# EAGLE board 00A-93-A1-01 (EAGLE 6.3)
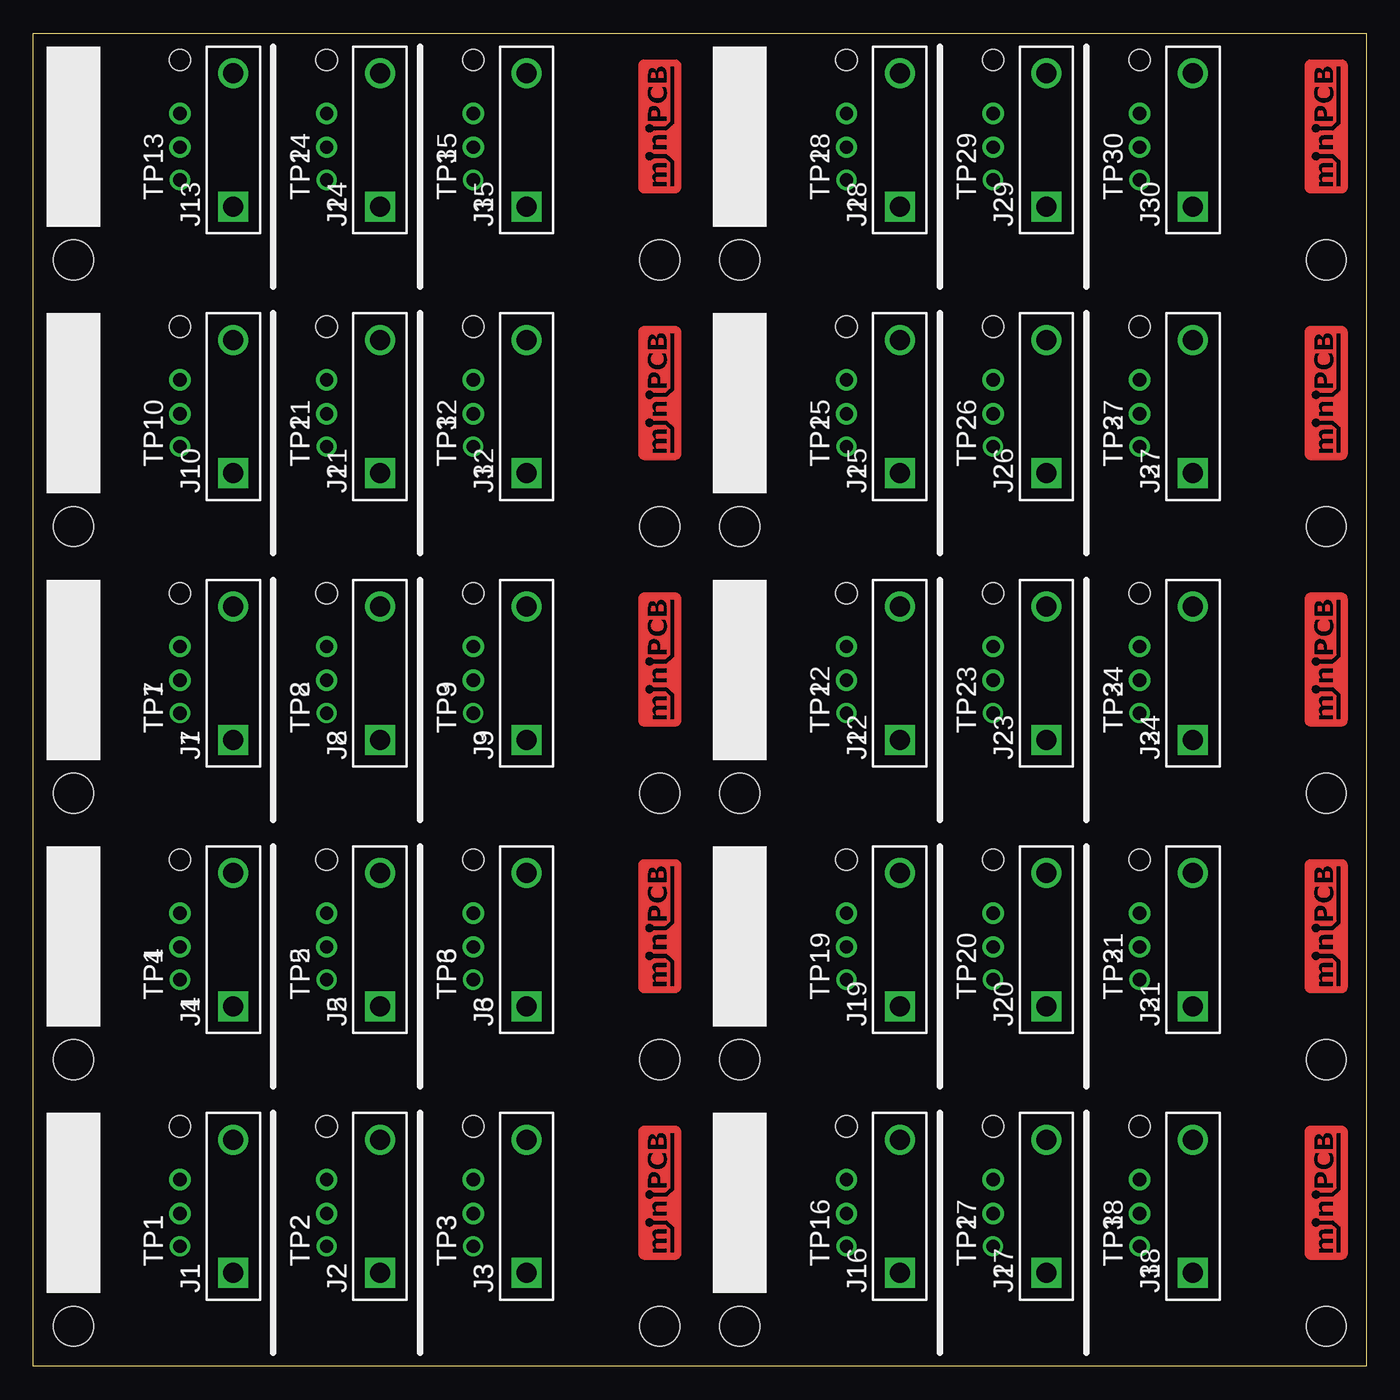
[diagram p0: board, top side]
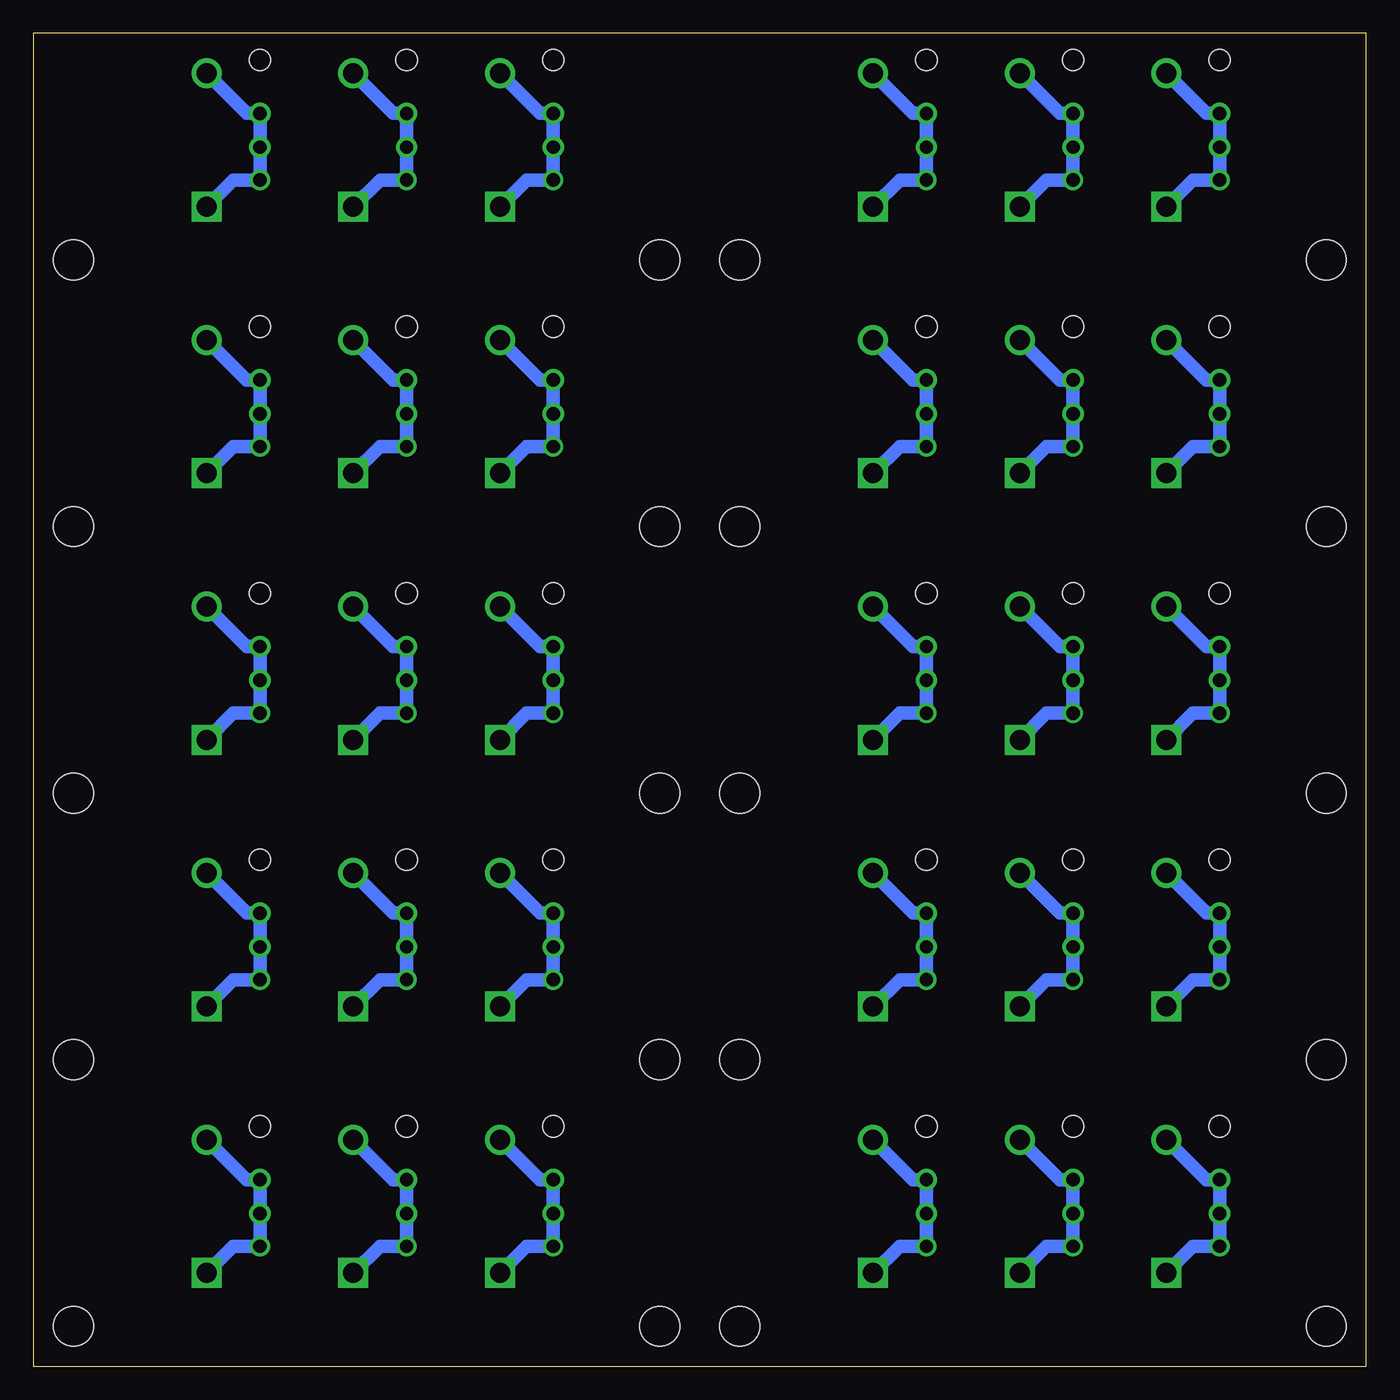
[diagram p1: board, bottom side, seen from below]

Size 100 x 100 mm. Coordinates in mm from the lower left corner, seen from the top.
Outline: 0,0 0,100 100,100 100,0 0,0
Copper layers (1*16): Top 0.035mm / dielectric 1.5mm / Bottom 0.035mm
Design rules "default": minimum track width 10mil, minimum drill 0.6mm, track to track 8mil, track to pad 8mil, pad to pad 8mil, via to via 8mil, smd to smd 8mil, copper to edge 40mil, drill to drill 8mil, minimum pad ring 10mil, minimum via ring 8mil, stop-mask expansion 4mil, vias tented up to drill 0mil, thermal gap 10mil

## Footprints (pad centres in the part's own frame; a part is rotated, then mirrored left to right if it is on the bottom)
PINS_1_KE6060 = drill 1.5 square: 1 -5,0 | drill 1.5: 2 5,0
PINS_1_1MM-NOTEXT = drill 1 pad 1.6: 1 4,0; 2 6.54,0 | hole 1.6: 0,0
MINIPCB_00A_20X50 = hole 3: 47,3; 3,3
PINS_1_TESTPOINT_KE5000_NOTEXT = drill 1: 1 0,0

## Placement (x,y rotation side)
E$1  [MINIPCB_PANEL_IMAGEFRAME]  -25,-35 0 top  (outside the outline)
J1  [PINS_1_KE6060]  15,12 90 top
J2  [PINS_1_KE6060]  26,12 90 top
J3  [PINS_1_KE6060]  37,12 90 top
J4  [PINS_1_KE6060]  15,32 90 top
J5  [PINS_1_KE6060]  26,32 90 top
J6  [PINS_1_KE6060]  37,32 90 top
J7  [PINS_1_KE6060]  15,52 90 top
J8  [PINS_1_KE6060]  26,52 90 top
J9  [PINS_1_KE6060]  37,52 90 top
J10  [PINS_1_KE6060]  15,72 90 top
J11  [PINS_1_KE6060]  26,72 90 top
J12  [PINS_1_KE6060]  37,72 90 top
J13  [PINS_1_KE6060]  15,92 90 top
J14  [PINS_1_KE6060]  26,92 90 top
J15  [PINS_1_KE6060]  37,92 90 top
J16  [PINS_1_KE6060]  65,12 90 top
J17  [PINS_1_KE6060]  76,12 90 top
J18  [PINS_1_KE6060]  87,12 90 top
J19  [PINS_1_KE6060]  65,32 90 top
J20  [PINS_1_KE6060]  76,32 90 top
J21  [PINS_1_KE6060]  87,32 90 top
J22  [PINS_1_KE6060]  65,52 90 top
J23  [PINS_1_KE6060]  76,52 90 top
J24  [PINS_1_KE6060]  87,52 90 top
J25  [PINS_1_KE6060]  65,72 90 top
J26  [PINS_1_KE6060]  76,72 90 top
J27  [PINS_1_KE6060]  87,72 90 top
J28  [PINS_1_KE6060]  65,92 90 top
J29  [PINS_1_KE6060]  76,92 90 top
J30  [PINS_1_KE6060]  87,92 90 top
P1  [PINS_1_1MM-NOTEXT]  11,18 270 top
P2  [PINS_1_1MM-NOTEXT]  22,18 270 top
P3  [PINS_1_1MM-NOTEXT]  33,18 270 top
P4  [PINS_1_1MM-NOTEXT]  11,38 270 top
P5  [PINS_1_1MM-NOTEXT]  22,38 270 top
P6  [PINS_1_1MM-NOTEXT]  33,38 270 top
P7  [PINS_1_1MM-NOTEXT]  11,58 270 top
P8  [PINS_1_1MM-NOTEXT]  22,58 270 top
P9  [PINS_1_1MM-NOTEXT]  33,58 270 top
P10  [PINS_1_1MM-NOTEXT]  11,78 270 top
P11  [PINS_1_1MM-NOTEXT]  22,78 270 top
P12  [PINS_1_1MM-NOTEXT]  33,78 270 top
P13  [PINS_1_1MM-NOTEXT]  11,98 270 top
P14  [PINS_1_1MM-NOTEXT]  22,98 270 top
P15  [PINS_1_1MM-NOTEXT]  33,98 270 top
P16  [PINS_1_1MM-NOTEXT]  61,18 270 top
P17  [PINS_1_1MM-NOTEXT]  72,18 270 top
P18  [PINS_1_1MM-NOTEXT]  83,18 270 top
P19  [PINS_1_1MM-NOTEXT]  61,38 270 top
P20  [PINS_1_1MM-NOTEXT]  72,38 270 top
P21  [PINS_1_1MM-NOTEXT]  83,38 270 top
P22  [PINS_1_1MM-NOTEXT]  61,58 270 top
P23  [PINS_1_1MM-NOTEXT]  72,58 270 top
P24  [PINS_1_1MM-NOTEXT]  83,58 270 top
P25  [PINS_1_1MM-NOTEXT]  61,78 270 top
P26  [PINS_1_1MM-NOTEXT]  72,78 270 top
P27  [PINS_1_1MM-NOTEXT]  83,78 270 top
P28  [PINS_1_1MM-NOTEXT]  61,98 270 top
P29  [PINS_1_1MM-NOTEXT]  72,98 270 top
P30  [PINS_1_1MM-NOTEXT]  83,98 270 top
PCB1  [MINIPCB_00A_20X50]  0,0 0 top
PCB2  [MINIPCB_00A_20X50]  0,20 0 top
PCB3  [MINIPCB_00A_20X50]  0,40 0 top
PCB4  [MINIPCB_00A_20X50]  0,60 0 top
PCB5  [MINIPCB_00A_20X50]  0,80 0 top
PCB6  [MINIPCB_00A_20X50]  50,0 0 top
PCB7  [MINIPCB_00A_20X50]  50,20 0 top
PCB8  [MINIPCB_00A_20X50]  50,40 0 top
PCB9  [MINIPCB_00A_20X50]  50,60 0 top
PCB10  [MINIPCB_00A_20X50]  50,80 0 top
TP1  [PINS_1_TESTPOINT_KE5000_NOTEXT]  11,9 90 top
TP2  [PINS_1_TESTPOINT_KE5000_NOTEXT]  22,9 90 top
TP3  [PINS_1_TESTPOINT_KE5000_NOTEXT]  33,9 90 top
TP4  [PINS_1_TESTPOINT_KE5000_NOTEXT]  11,29 90 top
TP5  [PINS_1_TESTPOINT_KE5000_NOTEXT]  22,29 90 top
TP6  [PINS_1_TESTPOINT_KE5000_NOTEXT]  33,29 90 top
TP7  [PINS_1_TESTPOINT_KE5000_NOTEXT]  11,49 90 top
TP8  [PINS_1_TESTPOINT_KE5000_NOTEXT]  22,49 90 top
TP9  [PINS_1_TESTPOINT_KE5000_NOTEXT]  33,49 90 top
TP10  [PINS_1_TESTPOINT_KE5000_NOTEXT]  11,69 90 top
TP11  [PINS_1_TESTPOINT_KE5000_NOTEXT]  22,69 90 top
TP12  [PINS_1_TESTPOINT_KE5000_NOTEXT]  33,69 90 top
TP13  [PINS_1_TESTPOINT_KE5000_NOTEXT]  11,89 90 top
TP14  [PINS_1_TESTPOINT_KE5000_NOTEXT]  22,89 90 top
TP15  [PINS_1_TESTPOINT_KE5000_NOTEXT]  33,89 90 top
TP16  [PINS_1_TESTPOINT_KE5000_NOTEXT]  61,9 90 top
TP17  [PINS_1_TESTPOINT_KE5000_NOTEXT]  72,9 90 top
TP18  [PINS_1_TESTPOINT_KE5000_NOTEXT]  83,9 90 top
TP19  [PINS_1_TESTPOINT_KE5000_NOTEXT]  61,29 90 top
TP20  [PINS_1_TESTPOINT_KE5000_NOTEXT]  72,29 90 top
TP21  [PINS_1_TESTPOINT_KE5000_NOTEXT]  83,29 90 top
TP22  [PINS_1_TESTPOINT_KE5000_NOTEXT]  61,49 90 top
TP23  [PINS_1_TESTPOINT_KE5000_NOTEXT]  72,49 90 top
TP24  [PINS_1_TESTPOINT_KE5000_NOTEXT]  83,49 90 top
TP25  [PINS_1_TESTPOINT_KE5000_NOTEXT]  61,69 90 top
TP26  [PINS_1_TESTPOINT_KE5000_NOTEXT]  72,69 90 top
TP27  [PINS_1_TESTPOINT_KE5000_NOTEXT]  83,69 90 top
TP28  [PINS_1_TESTPOINT_KE5000_NOTEXT]  61,89 90 top
TP29  [PINS_1_TESTPOINT_KE5000_NOTEXT]  72,89 90 top
TP30  [PINS_1_TESTPOINT_KE5000_NOTEXT]  83,89 90 top

## Library data of the parts
E$1 J1-J30 P1-P30 TP1-TP30 = minipcb
PCB1-PCB10 = minipcb; PART_NUMBER: 00A-93-A1-01

## Nets
N$1: J1.1 J1.2 P1.1 P1.2 TP1.1
N$2: J4.1 J4.2 P4.1 P4.2 TP4.1
N$3: J2.1 J2.2 P2.1 P2.2 TP2.1
N$4: J5.1 J5.2 P5.1 P5.2 TP5.1
N$5: J3.1 J3.2 P3.1 P3.2 TP3.1
N$6: J6.1 J6.2 P6.1 P6.2 TP6.1
N$7: J7.1 J7.2 P7.1 P7.2 TP7.1
N$8: J8.1 J8.2 P8.1 P8.2 TP8.1
N$9: J9.1 J9.2 P9.1 P9.2 TP9.1
N$10: J10.1 J10.2 P10.1 P10.2 TP10.1
N$11: J11.1 J11.2 P11.1 P11.2 TP11.1
N$12: J12.1 J12.2 P12.1 P12.2 TP12.1
N$13: J13.1 J13.2 P13.1 P13.2 TP13.1
N$14: J14.1 J14.2 P14.1 P14.2 TP14.1
N$15: J15.1 J15.2 P15.1 P15.2 TP15.1
N$16: J16.1 J16.2 P16.1 P16.2 TP16.1
N$17: J17.1 J17.2 P17.1 P17.2 TP17.1
N$18: J18.1 J18.2 P18.1 P18.2 TP18.1
N$19: J19.1 J19.2 P19.1 P19.2 TP19.1
N$20: J20.1 J20.2 P20.1 P20.2 TP20.1
N$21: J21.1 J21.2 P21.1 P21.2 TP21.1
N$22: J22.1 J22.2 P22.1 P22.2 TP22.1
N$23: J23.1 J23.2 P23.1 P23.2 TP23.1
N$24: J24.1 J24.2 P24.1 P24.2 TP24.1
N$25: J25.1 J25.2 P25.1 P25.2 TP25.1
N$26: J26.1 J26.2 P26.1 P26.2 TP26.1
N$27: J27.1 J27.2 P27.1 P27.2 TP27.1
N$28: J28.1 J28.2 P28.1 P28.2 TP28.1
N$29: J29.1 J29.2 P29.1 P29.2 TP29.1
N$30: J30.1 J30.2 P30.1 P30.2 TP30.1

## Tracks (layer width: path | path; a pad name or v marks a point on that pad's centre or on a via)
N$1
  Bottom 1: J1.2 12,14 P1.1 P1.2 TP1.1 13,9 J1.1
N$2
  Bottom 1: J4.2 12,34 P4.1 P4.2 TP4.1 13,29 J4.1
N$3
  Bottom 1: J2.2 23,14 P2.1 P2.2 TP2.1 24,9 J2.1
N$4
  Bottom 1: J5.2 23,34 P5.1 P5.2 TP5.1 24,29 J5.1
N$5
  Bottom 1: J3.2 34,14 P3.1 P3.2 TP3.1 35,9 J3.1
N$6
  Bottom 1: J6.2 34,34 P6.1 P6.2 TP6.1 35,29 J6.1
N$7
  Bottom 1: J7.2 12,54 P7.1 P7.2 TP7.1 13,49 J7.1
N$8
  Bottom 1: J8.2 23,54 P8.1 P8.2 TP8.1 24,49 J8.1
N$9
  Bottom 1: J9.2 34,54 P9.1 P9.2 TP9.1 35,49 J9.1
N$10
  Bottom 1: J10.2 12,74 P10.1 P10.2 TP10.1 13,69 J10.1
N$11
  Bottom 1: J11.2 23,74 P11.1 P11.2 TP11.1 24,69 J11.1
N$12
  Bottom 1: J12.2 34,74 P12.1 P12.2 TP12.1 35,69 J12.1
N$13
  Bottom 1: J13.2 12,94 P13.1 P13.2 TP13.1 13,89 J13.1
N$14
  Bottom 1: J14.2 23,94 P14.1 P14.2 TP14.1 24,89 J14.1
N$15
  Bottom 1: J15.2 34,94 P15.1 P15.2 TP15.1 35,89 J15.1
N$16
  Bottom 1: J16.2 62,14 P16.1 P16.2 TP16.1 63,9 J16.1
N$17
  Bottom 1: J17.2 73,14 P17.1 P17.2 TP17.1 74,9 J17.1
N$18
  Bottom 1: J18.2 84,14 P18.1 P18.2 TP18.1 85,9 J18.1
N$19
  Bottom 1: J19.2 62,34 P19.1 P19.2 TP19.1 63,29 J19.1
N$20
  Bottom 1: J20.2 73,34 P20.1 P20.2 TP20.1 74,29 J20.1
N$21
  Bottom 1: J21.2 84,34 P21.1 P21.2 TP21.1 85,29 J21.1
N$22
  Bottom 1: J22.2 62,54 P22.1 P22.2 TP22.1 63,49 J22.1
N$23
  Bottom 1: J23.2 73,54 P23.1 P23.2 TP23.1 74,49 J23.1
N$24
  Bottom 1: J24.2 84,54 P24.1 P24.2 TP24.1 85,49 J24.1
N$25
  Bottom 1: J25.2 62,74 P25.1 P25.2 TP25.1 63,69 J25.1
N$26
  Bottom 1: J26.2 73,74 P26.1 P26.2 TP26.1 74,69 J26.1
N$27
  Bottom 1: J27.2 84,74 P27.1 P27.2 TP27.1 85,69 J27.1
N$28
  Bottom 1: J28.2 62,94 P28.1 P28.2 TP28.1 63,89 J28.1
N$29
  Bottom 1: J29.2 73,94 P29.1 P29.2 TP29.1 74,89 J29.1
N$30
  Bottom 1: J30.2 84,94 P30.1 P30.2 TP30.1 85,89 J30.1

## Text on the board
_tNames: TP1 | TP2 | TP3 | TP1 | TP2 | TP3 | J1 | J2 | J3 | J1 | J2 | J3 | TP1 | TP2 | TP3 | TP1 | TP2 | TP3 | J1 | J2 | J3 | J1 | J2 | J3 | TP1 | TP2 | TP3 | TP1 | TP2 | TP3 | J1 | J2 | J3 | J1 | J2 | J3 | TP1 | TP2 | TP3 | TP1 | TP2 | TP3 | J1 | J2 | J3 | J1 | J2 | J3 | TP1 | TP2 | TP3 | TP1 | TP2 | TP3 | J1 | J2 | J3 | J1 | J2 | J3